# Altium PCB 8 Motors.PcbDoc (part 3 of 4)
Units mm, origin at the board's own origin, x right, y up, seen from the top; angles counter-clockwise.
Board outline 155 x 95 mm, 4 copper layers (Top Layer, GND, POWER, Bottom Layer), stack 0.778 mm thick; 196 components, 175 nets, 825 pads, 449 vias.
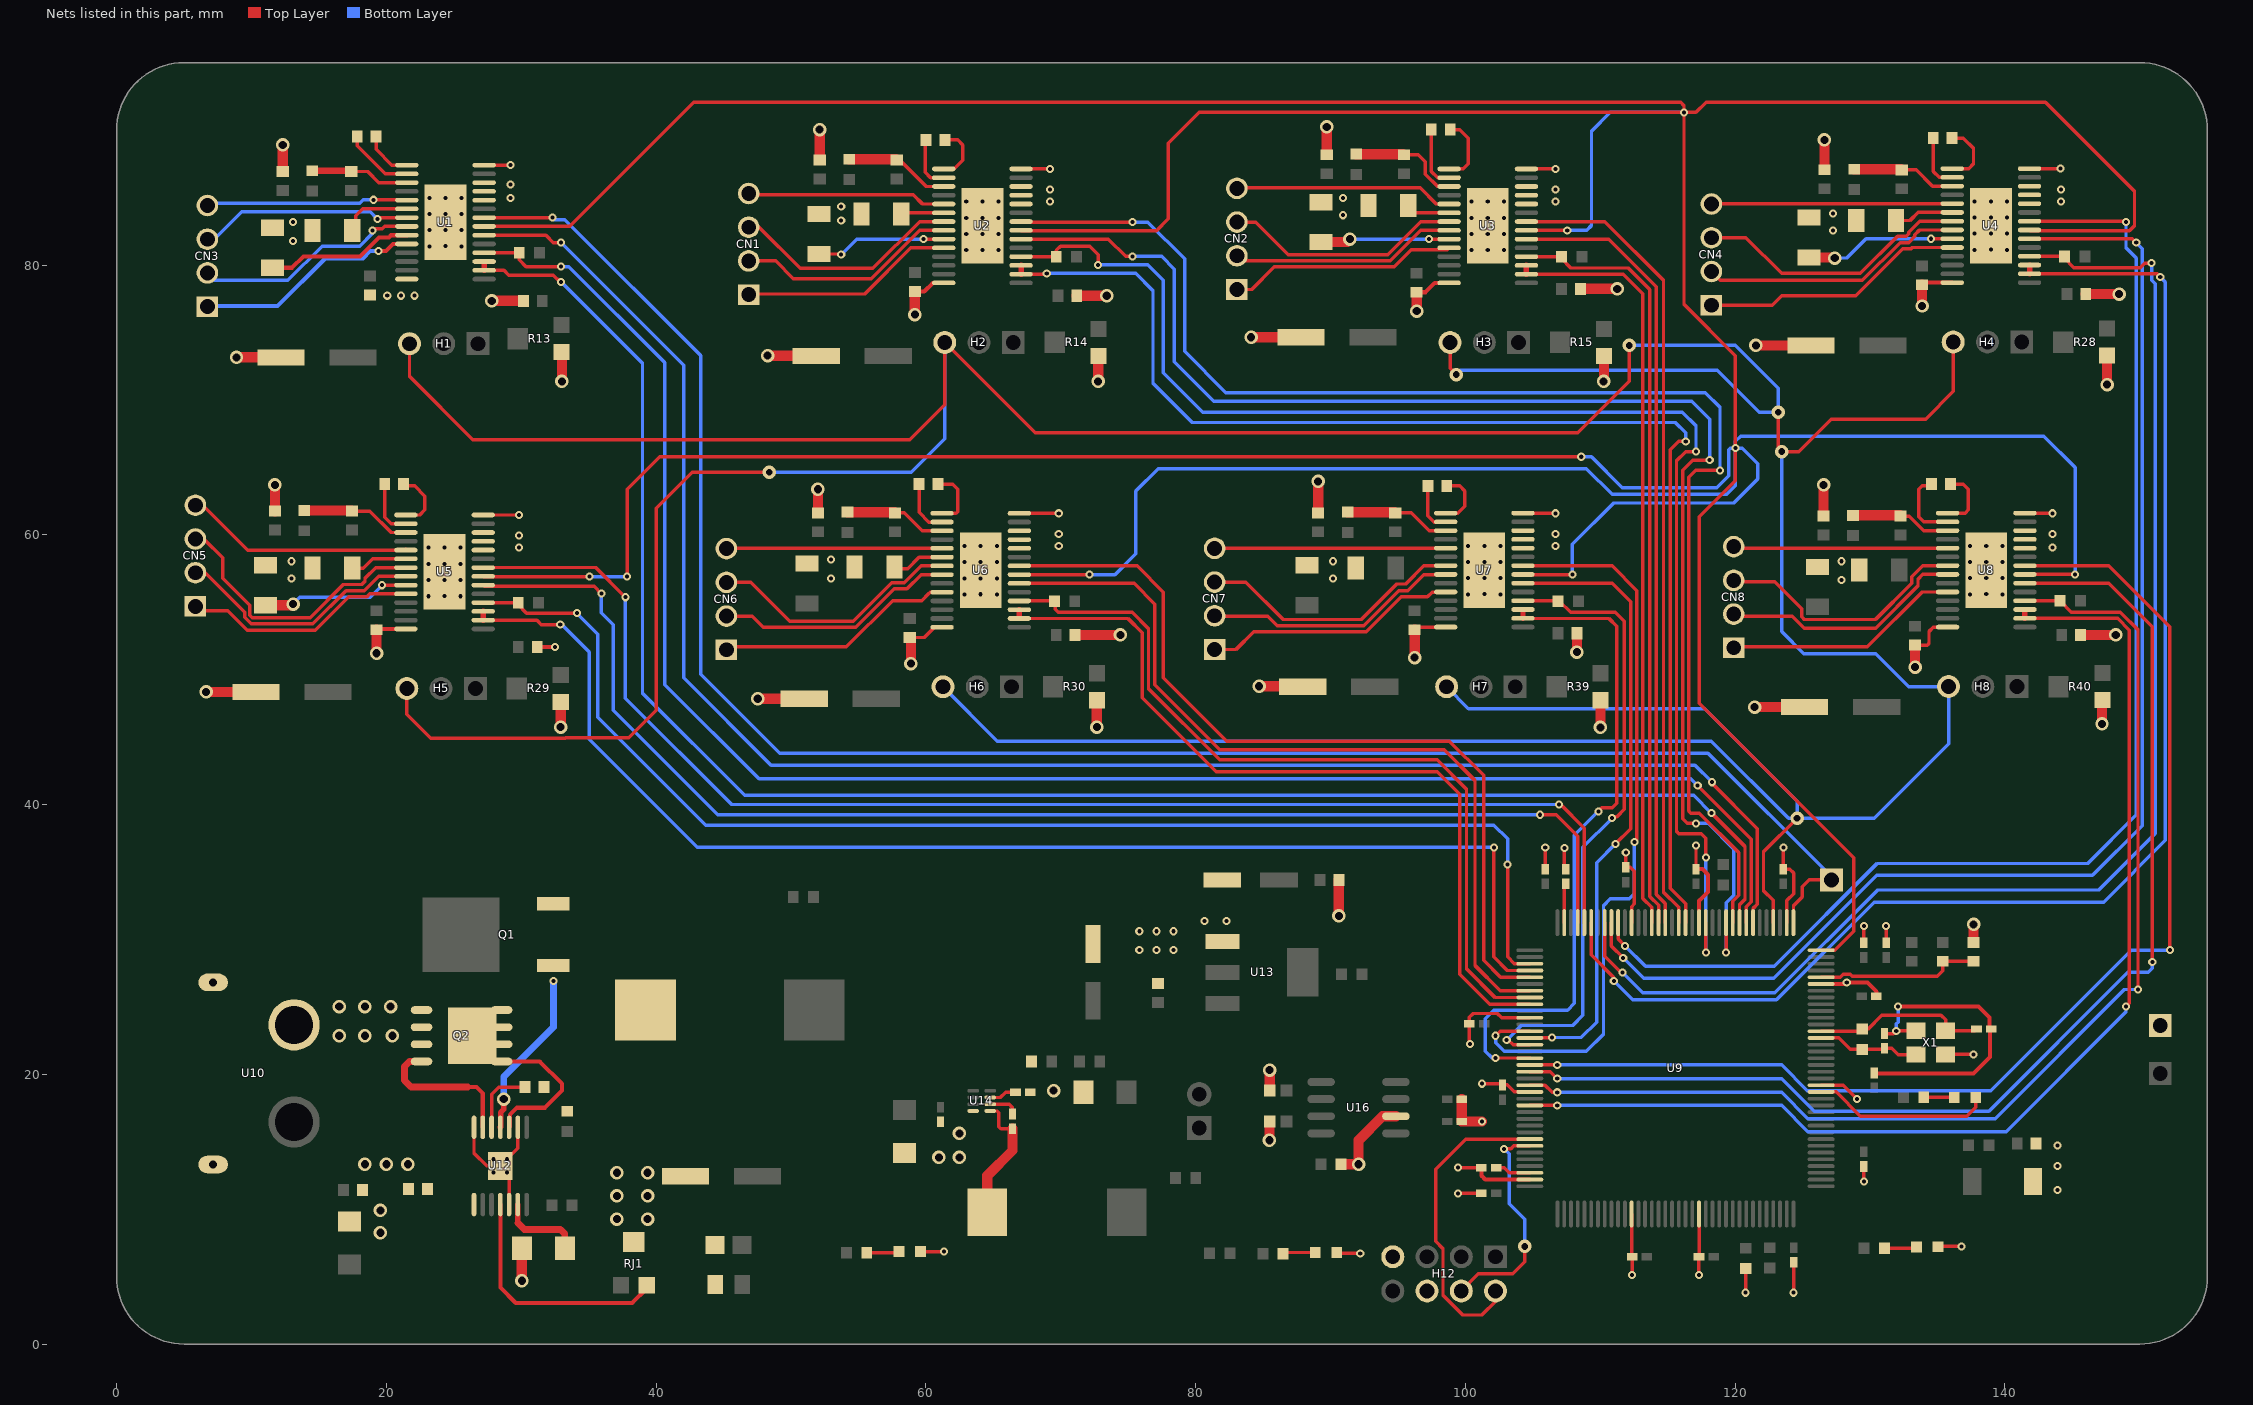
[diagram p4: the nets of this part, all layers, seen from the top]

## Via types
v1: diameter 0.6, hole 0.3, Top Layer to Bottom Layer, tented both sides, 222 vias
v2: diameter 0.5, hole 0.3, Top Layer to Bottom Layer, tented both sides, 96 vias
v3: diameter 1, hole 0.6, Top Layer to Bottom Layer, tented both sides, 88 vias
v4: diameter 1, hole 0.6, Top Layer to Bottom Layer, 17 vias
v5: diameter 1, hole 0.5, Top Layer to Bottom Layer, tented both sides, 16 vias
v6: diameter 4, hole 3.2, Top Layer to Bottom Layer, tented both sides, 4 vias
v7: diameter 0.61, hole 0.305, Top Layer to Bottom Layer, tented both sides, 4 vias
v8: diameter 0.6, hole 0.3, Top Layer to Bottom Layer, 2 vias

## Nets (pads, with @x,y where several pads share a name; then routed paths per layer and width w, separated by ;. In a path a pad name is that pad's centre, name@x,y a point inside that pad or via, vN(x,y) a via of type N, cw(c..) or ccw(c..) an arc to the next point about the centre after c; other vN are vias at no path point) (continued)
GND: C7.1 C8.1 C9.1 C10.2 C11.2 C12.2 C13.1 C14.1 C15.1 C16.1 C17.1 C18.1 C25.1 C26.1 C27.1 C28.2 C29.2 C30.2 C31.1 C32.1 C33.1 C34.1 C35.1 C36.1 C41.1 C42.1 C43.2 C44.2 C45.1 C46.1 C47.1 C48.1 C49.2 C50.1 C51.1 C52.1 C53.1 C54.1 C55.2 C56.2 C57.2 C58.2 C59.2 C60.2 C61.2 C62.2 C63.2 C64.2 C65.2 C66.2 C67.1 C68.1 C69.1 C70.1 C71.1 C72.2 C73.1 C76.2 C78.1 C79.1 C80.2 C81.2 C82.2 C83.2 C84.1 C85.1 C86.2 C87.2 H9.1 H12.6 H12.7 LED2_+24V.1 LED3_+5V.1 LED4_+3.3V.1 Q2.1 Q2.2 Q2.3 R4.1 R5.1 R6.1 R7.1 R8.1 R9.1 R13.1 R14.1 R15.1 R19.1 R20.1 R21.1 R22.1 R23.1 R24.1 R28.1 R29.1 R30.1 R33.1 R34.1 R35.1 R36.1 R39.1 R40.1 R42.1 R51.1 R56.2 RJ1.2 SW1.2 U1.14 U1.24 U1.25 U1.26 U1.28 U1.29 U2.14 U2.24 U2.25 U2.26 U2.28 U2.29 U3.14 U3.24 U3.25 U3.26 U3.28 U3.29 U4.14 U4.24 U4.25 U4.26 U4.28 U4.29 U5.14 U5.24 U5.25 U5.26 U5.28 U5.29 U6.14 U6.24 U6.25 U6.26 U6.28 U6.29 U7.14 U7.24 U7.25 U7.26 U7.28 U7.29 U8.14 U8.24 U8.25 U8.26 U8.28 U8.29 U9.16 U9.31 U9.38 U9.51 U9.61 U9.83 U9.94 U9.107 U9.120 U9.130 U10.1 U10.2 U10.4 U12.5 U12.9 U12.14 U12.15 U13.1 U14.4 U16.2 U17.1 U18.1 X1.2 X1.4 | length 254.8
  Top Layer w0.254: C35.1@19.27,52.966 C35.1@19.322,53.018 ; U12.14@26.498,16.074 26.498,14.142 27.432,13.208 U12.15@28.448,13.208 ; U5.28@27.178,61.468 v1(29.845,61.468) ; U1.28@27.25,87.41 v1@29.176,87.41 ; U12.5@29.098,10.342 29.098,12.558 v7(28.948,12.708) U12.15@28.448,13.208 ; U12.9@29.748,16.074 29.748,14.508 U12.15@28.448,13.208 ; R13.1@32.994,73.549 R13.1@33.02,73.523 ; C11.2@51.834,73.279 cw(c51.834,73.245) C11.2@51.868,73.245 ; C36.1@58.801,52.386 58.894,52.386 59.879,52.386 60.638,53.145 U6.14@61.197,53.145 ; LED2_+24V.1@59.6,6.861 v1@61.338,6.861 ; U6.28@66.929,61.595 v1(69.85,61.595) ; U2.28@67.056,87.122 v1(69.215,87.122) ; R14.1@72.771,73.232 cw(c72.8,73.232) R14.1@72.8,73.261 ; LED3_+5V.1@90.461,6.798 ccw(c90.528,6.798) 90.528,6.731 v1(92.202,6.731) ; C47.1@96.232,52.966 96.411,53.145 U7.14@98.535,53.145 ; v1(99.441,11.176) C61.2@101.182,11.176 ; v1(99.441,13.081) C69.1@101.182,13.081 ; v1@100.33,22.352 100.293,22.389 C64.2@100.293,23.749 100.293,24.22 100.584,24.511 102.362,24.511 102.676,24.197 U9.83@104.77,24.197 ; v1(101.219,19.304) 102.653,19.304 C66.2@102.743,19.214 103.087,19.214 103.604,18.697 U9.94@104.77,18.697 ; U7.28@104.267,61.595 v1(106.68,61.595) ; U3.28@104.521,87.122 v1(106.68,87.122) ; C57.2@105.918,35.216 v1(105.918,36.83) ; v1(107.34,36.788) 107.34,35.318 C68.1@107.442,35.216 ; v1(111.887,36.449) C56.2@111.887,35.343 112.231,35.343 112.522,35.052 112.522,32.637 112.32,32.435 U9.61@112.32,31.247 ; U9.120@112.32,9.647 112.32,6.515 C62.2@112.358,6.477 v1(112.358,5.117) ; C55.2@117.094,35.216 v1(117.094,36.957) ; v1(117.311,5.117) C63.2@117.311,6.477 117.32,6.486 U9.130@117.32,9.647 ; v1(120.777,3.81) R42.1@120.777,5.597 ; v1(123.571,36.83) C58.2@123.571,35.216 124.042,35.216 124.333,34.925 124.333,33.401 123.82,32.888 U9.38@123.82,31.247 ; v1(124.333,3.81) C65.2@124.333,6.059 ; U9.16@126.37,19.197 127.996,19.197 v1(129.032,18.161) ; v1(129.54,12.065) C49.2@129.54,13.171 ; C51.1@129.54,29.501 C51.1@129.54,29.755 v1(129.54,30.988) ; C59.2@130.302,20.103 C59.2@130.339,20.066 ; C53.1@131.064,23.024 131.736,23.024 v1(131.939,23.227) X1.4@133.393,23.227 ; C50.1@131.191,29.501 C50.1@131.191,29.755 v1(131.191,30.988) ; C48.1@133.331,51.823 134.246,51.823 134.366,51.943 134.366,52.832 134.694,53.16 U8.14@135.746,53.16 ; C34.1@133.849,78.531 C34.1@134.015,78.697 ; LED4_+3.3V.1@135.038,7.21 cw(c135.067,7.21) 135.067,7.239 v1(136.779,7.239) ; X1.2@135.593,21.477 v8@137.682,21.477 ; U8.28@141.478,61.61 141.478,61.595 v1(143.51,61.595) ; U4.28@141.821,87.147 v1(144.12,87.147) ; R40.1@147.193,47.72 R40.1@147.222,47.749
  Top Layer w0.305: C35.1@19.322,53.018 U5.14@21.446,53.018 ; C32.1@31.18,51.689 v1(32.512,51.689) ; C17.1@59.182,78.04 59.879,78.04 60.511,78.672 U2.14@61.324,78.672 ; C18.1@96.359,77.985 97.035,77.985 97.722,78.672 U3.14@98.789,78.672 ; C69.1@101.182,13.081 101.182,12.483 101.468,12.197 U9.107@104.77,12.197 ; C55.2@117.094,35.216 117.565,35.216 117.983,34.798 117.983,33.528 117.32,32.865 U9.51@117.32,31.247 ; U9.31@126.37,26.697 128.17,26.697 v1(128.27,26.797) 129.794,26.797 130.466,26.125 C60.2@130.466,25.781 ; C59.2@130.339,20.066 137.668,20.066 138.901,21.299 138.901,23.368 138.848,23.421 138.848,24.22 138.049,25.019 v8(132.08,25.019) ; C34.1@134.015,78.697 U4.14@136.089,78.697
  Top Layer w0.762: v3(6.638,48.353) C30.2@10.339,48.353 ; v3(8.89,73.152) C10.2@12.189,73.152 ; C26.1@11.739,61.753 v3(11.739,63.699) ; C7.1@12.319,86.933 v3(12.319,88.9) ; v3(19.27,51.215) C35.1@19.27,52.966 ; v3(27.813,77.343) C14.1@30.161,77.343 ; v3(30.044,4.699) C73.1@30.044,7.112 ; v3(32.922,45.749) R29.1@32.922,47.607 ; v3(33.02,71.374) R13.1@33.02,73.523 ; v3(47.532,47.845) C29.2@50.979,47.845 ; v3(48.26,73.279) C11.2@51.834,73.279 ; C27.1@51.998,61.626 v3(51.998,63.373) ; C8.1@52.125,87.788 v3(52.125,90.043) ; v3(58.894,50.453) C36.1@58.894,52.386 ; v3(59.182,76.327) C17.1@59.182,78.04 ; C33.1@71.058,52.578 v3(74.422,52.578) ; C15.1@71.185,77.724 v3(73.406,77.724) ; v3(72.673,45.749) R30.1@72.673,47.734 ; v3(72.771,71.374) R14.1@72.771,73.232 ; v3(84.108,74.642) C12.2@87.809,74.642 ; v3(84.709,48.768) 87.902,48.768 C43.2@87.936,48.734 ; v3(85.471,15.113) 85.471,16.497 U18.1@85.484,16.51 ; U17.1@85.484,18.796 v3(85.484,20.307) ; C41.1@89.082,61.626 v3(89.082,63.953) ; C9.1@89.717,88.169 v3(89.717,90.242) ; v3(90.616,31.75) C83.2@90.616,34.417 ; R56.2@90.788,13.335 v3(92.075,13.335) 92.075,15.113 93.853,16.891 U16.2@94.847,16.891 ; v3(96.232,50.893) C47.1@96.232,52.966 ; C18.1@96.359,77.985 96.393,77.951 v3(96.393,76.581) ; C86.2@99.732,18.161 C87.2@99.732,16.51 v1(101.219,16.51) ; v3(108.269,51.308) C45.1@108.269,52.705 ; C16.1@108.523,78.232 v3(111.252,78.232) ; v3(110.011,45.72) R39.1@110.011,47.734 ; v3(110.236,71.374) 110.265,71.403 R15.1@110.265,73.261 ; v3(121.431,47.225) C44.2@125.147,47.225 ; v3(121.539,74.041) 125.608,74.041 C28.2@125.617,74.032 ; C42.1@126.547,61.387 v3(126.547,63.699) ; C25.1@126.619,87.06 v3(126.619,89.281) ; v3@133.331,50.057 v3(133.331,50.184) C48.1@133.331,51.823 ; v3(133.849,76.962) C34.1@133.849,78.531 ; C52.1@137.668,29.783 v3(137.668,31.115) ; C46.1@145.607,52.578 v3(148.209,52.578) ; C31.1@145.988,77.851 v3(148.463,77.851) ; v3(147.193,45.974) R40.1@147.193,47.72 ; v3(147.565,71.129) R28.1@147.565,73.286
  Bottom Layer w0.254: v1(131.939,23.227) 131.939,23.735 132.08,23.876 v8(132.08,25.019)
  other v1: 61.341,6.861 143.891,11.43 143.891,13.208 143.891,14.732 100.33,22.262 75.819,29.21 77.089,29.21 78.359,29.21 75.819,30.607 77.089,30.607 78.359,30.607 80.645,31.369 82.296,31.369 127.889,56.642 12.954,56.769 52.959,56.769 90.17,56.769 12.954,58.039 90.17,58.039 127.889,58.039 52.959,58.166 29.845,59.055 143.51,59.055 69.85,59.182 106.68,59.182 29.845,59.944 69.85,60.071 106.68,60.071 143.51,60.071 20.066,77.724 21.082,77.724 22.098,77.724 13.081,81.788 127.254,82.55 13.081,83.185 53.721,83.312 90.932,83.693 127.254,83.82 53.721,84.328 69.215,84.709 106.68,84.709 144.145,84.709 29.206,84.963 90.932,84.963 69.215,85.598 106.68,85.598 144.145,85.598 29.206,85.979 29.206,87.41
  other v2: 23.112,55.443 25.512,55.443 24.312,55.465 62.863,55.57 65.263,55.57 100.201,55.585 102.601,55.585 137.412,55.585 139.812,55.585 64.063,55.592 101.401,55.607 138.612,55.607 23.112,56.643 24.312,56.643 25.512,56.643 62.863,56.77 64.063,56.77 65.263,56.77 100.201,56.785 101.401,56.785 102.601,56.785 137.412,56.785 138.612,56.785 139.812,56.785 23.112,57.843 24.312,57.843 25.512,57.843 62.863,57.97 64.063,57.97 65.263,57.97 100.201,57.985 101.401,57.985 102.601,57.985 137.412,57.985 138.612,57.985 139.812,57.985 23.112,59.043 24.312,59.043 25.512,59.043 62.863,59.17 64.063,59.17 65.263,59.17 100.201,59.185 101.401,59.185 102.601,59.185 137.412,59.185 138.612,59.185 139.812,59.185 62.99,81.097 65.39,81.097 100.455,81.097 102.855,81.097 64.19,81.119 101.655,81.119 137.755,81.122 140.155,81.122 138.955,81.144 23.184,81.385 25.584,81.385 24.384,81.407 62.99,82.297 64.19,82.297 65.39,82.297 100.455,82.297 101.655,82.297 102.855,82.297 137.755,82.322 138.955,82.322 140.155,82.322 23.184,82.585 24.384,82.585 25.584,82.585 62.99,83.497 64.19,83.497 65.39,83.497 100.455,83.497 101.655,83.497 102.855,83.497 137.755,83.522 138.955,83.522 140.155,83.522 23.184,83.785 24.384,83.785 25.584,83.785 62.99,84.697 64.19,84.697 65.39,84.697 100.455,84.697 101.655,84.697 102.855,84.697 137.755,84.722 138.955,84.722 140.155,84.722 23.184,84.985 24.384,84.985 25.584,84.985
  other v3: 19.558,8.255 37.084,9.271 39.37,9.271 19.558,9.906 37.084,10.986 39.37,10.986 37.084,12.7 39.37,12.7 18.415,13.335 20.002,13.335 21.59,13.335 60.96,13.843 62.484,13.843 62.484,15.621
  other v4: 69.469,18.796 16.51,22.86 18.415,22.86 20.447,22.86 16.51,25.019 18.415,25.019 20.32,25.019
  other v7: 27.948,12.708 27.948,13.708 28.948,13.708
  other v8: 137.668,21.463
LED1: LED1.1 U9.15 | length 13.2
  Top Layer w0.254: U9.15@126.37,18.697 127.48,18.697 129.286,16.891 137.16,16.891 137.832,17.563 LED1.1@137.832,18.291
M1A1: CN3.4 U1.5 | length 15
  Top Layer w0.254: v1(19.05,84.836) U1.5@21.518,84.836
  Bottom Layer w0.254: CN3.4@6.731,84.415 6.898,84.582 18.034,84.582 18.288,84.836 v1(19.05,84.836)
M1A2: CN3.3 U1.7 | length 16.1
  Top Layer w0.254: v1@19.304,83.566 v1@19.342,83.528 ; v1(19.342,83.401) v1@19.342,83.528 ; U1.7@21.518,83.51 19.502,83.51 19.431,83.439 v1@19.342,83.528
  Bottom Layer w0.254: CN3.3@6.731,81.915 7.239,81.915 9.271,83.947 18.796,83.947 v1(19.342,83.401)
M1B1: CN3.1 U1.10 | length 16.8
  Top Layer w0.305: v1(19.431,81.026) 19.96,81.026 20.494,81.56 U1.10@21.518,81.56
  Bottom Layer w0.305: CN3.1@6.731,76.962 11.938,76.962 15.469,80.493 18.263,80.493 18.796,81.026 v1(19.431,81.026) v1@19.431,81.153
M1B2: CN3.2 U1.8 | length 16.9
  Top Layer w0.254: v1(18.971,82.564) 19.089,82.682 19.692,82.682 19.87,82.86 U1.8@21.518,82.86
  Bottom Layer w0.254: CN3.2@6.731,79.415 7.279,78.867 12.7,78.867 15.24,81.407 18.034,81.407 18.971,82.344 v1(18.971,82.564) v1@19.036,82.564
M1D: U1.20 U9.43 | length 133.3
  Top Layer w0.254: U1.20@27.25,82.21 31.836,82.21 32.385,81.661 v1(32.956,81.661) ; v1@118.244,41.611 121.641,38.215 121.641,32.614 121.32,32.293 U9.43@121.32,31.247
  Bottom Layer w0.254: v1(32.956,81.661) 42.037,72.581 42.037,49.403 48.514,42.926 117.019,42.926 v1(118.289,41.656)
M1FA: R10.1 U1.18 U9.44 | length 132.6
  Top Layer w0.254: U1.18@27.25,80.91 29.843,80.91 R10.1@29.854,80.899 29.854,80.382 30.353,79.883 v1(32.956,79.883) v1@33.02,79.883 ; v1(117.221,41.402) 121.183,37.44 121.183,32.803 120.82,32.44 U9.44@120.82,31.247
  Bottom Layer w0.254: v1(32.956,79.883) 33.528,79.883 40.64,72.771 40.64,48.895 47.625,41.91 116.713,41.91 v1(117.221,41.402)
M1SL: U1.16 U1.17 U9.45 | length 131.9
  Top Layer w0.254: U1.16@27.25,79.61 28.721,79.61 29.083,79.248 32.385,79.248 v1@32.893,78.74 ; v1(118.237,39.37) 118.243,39.376 120.726,36.892 120.726,32.992 120.32,32.586 U9.45@120.32,31.247
  Top Layer w0.406: U1.16@27.25,79.61 U1.17@27.25,80.26
  Bottom Layer w0.254: v1(32.956,78.74) 38.989,72.707 38.989,48.26 46.563,40.686 116.921,40.686 v1(118.237,39.37)
M1ST: H10.1 U1.22 U9.37 | length 139.5
  Top Layer w0.254: U1.22@27.25,83.51 v1(32.314,83.51) ; U9.37@124.32,31.247 124.32,32.499 124.968,33.147 124.968,33.909 125.476,34.417 H10.1@127.127,34.417
  Bottom Layer w0.254: v1(32.314,83.51) 32.466,83.358 33.239,83.358 43.307,73.29 43.307,49.657 49.149,43.815 117.983,43.815 127.127,34.671 H10.1@127.127,34.417
M2A1: CN1.4 U2.5 | length 14.8
  Top Layer w0.254: CN1.4@46.863,85.304 46.95,85.217 59.055,85.217 59.75,84.522 U2.5@61.324,84.522
M2A2: CN1.3 U2.7 | length 17.2
  Top Layer w0.254: CN1.3@46.863,82.804 47.625,82.804 50.673,79.756 56.067,79.756 59.533,83.222 U2.7@61.324,83.222
M2B1: CN1.1 U2.10 | length 15.9
  Top Layer w0.254: CN1.1@46.863,77.804 46.91,77.851 55.455,77.851 58.876,81.272 U2.10@61.324,81.272
M2B2: CN1.2 U2.8 | length 16.5
  Top Layer w0.254: CN1.2@46.863,80.304 48.855,80.304 50.165,78.994 55.952,78.994 59.53,82.572 U2.8@61.324,82.572
M2D: U2.20 U9.47 | length 106.7
  Top Layer w0.254: U2.20@67.056,81.922 73.526,81.922 74.803,80.645 v1(75.311,80.645) ; v1(117.094,38.608) 116.459,38.608 116.103,38.964 116.103,64.795 116.84,65.532 v1(118.11,65.532) ; v1(119.32,29.023) U9.47@119.32,31.247
  Bottom Layer w0.254: v1(75.311,80.645) 77.47,80.645 78.422,79.692 78.422,72.834 81.343,69.913 116.776,69.913 118.11,68.58 v1(118.11,65.532) ; v1(117.094,38.608) 117.985,38.608 119.888,36.705 119.888,33.274 119.32,32.706 v1(119.32,29.023)
M2FA: R11.1 U2.18 U9.50 | length 104.8
  Top Layer w0.254: U2.18@67.056,80.622 69.649,80.622 69.649,81.079 69.977,81.407 72.136,81.407 72.771,80.772 v1(72.771,80.01) ; v1(117.094,66.167) 116.332,66.167 115.646,65.481 115.646,38.024 115.824,37.846 117.475,37.846 117.82,37.501 v1(117.82,36.068) ; v1(117.82,29.023) U9.50@117.82,31.247
  Bottom Layer w0.254: v1(72.771,80.01) 76.454,80.01 77.597,78.867 77.597,72.009 80.518,69.088 116.078,69.088 117.094,68.072 v1(117.094,66.167) ; v1(117.82,29.023) v1(117.82,36.068)
M2SL: U2.16 U2.17 U9.53 | length 96.4
  Top Layer w0.254: U2.16@67.056,79.322 68.908,79.322 v1(68.961,79.375) ; U9.53@116.32,31.247 116.32,32.651 115.189,33.782 115.189,66.294 115.824,66.929 v1(116.332,66.929)
  Top Layer w0.406: U2.16@67.056,79.322 U2.17@67.056,79.972
  Bottom Layer w0.254: v1(68.961,79.375) 75.565,79.375 76.835,78.105 76.835,71.247 79.756,68.326 115.57,68.326 116.332,67.564 v1(116.332,66.929)
M2ST: U2.22 U9.46 | length 103.9
  Top Layer w0.254: U2.22@67.056,83.222 67.093,83.185 v1(75.311,83.185) ; v1(118.872,64.77) 117.069,64.77 116.561,64.262 116.561,39.522 116.713,39.37 117.346,39.37 120.269,36.447 120.269,33.274 119.82,32.825 U9.46@119.82,31.247
  Bottom Layer w0.254: v1(75.311,83.185) 76.454,83.185 79.184,80.454 79.184,73.596 82.237,70.544 117.788,70.544 118.872,69.46 v1(118.872,64.77)
M3A1: CN2.4 U3.5 | length 16.2
  Top Layer w0.254: CN2.4@83.058,85.685 83.098,85.725 96.647,85.725 97.85,84.522 U3.5@98.789,84.522
M3A2: CN2.3 U3.7 | length 17.7
  Top Layer w0.254: CN2.3@83.058,83.185 84.455,83.185 86.868,80.772 94.234,80.772 96.684,83.222 U3.7@98.789,83.222
M3B1: CN2.1 U3.10 | length 17
  Top Layer w0.254: CN2.1@83.058,78.185 84.154,78.185 85.827,79.858 94.717,79.858 95.983,81.124 98.641,81.124 U3.10@98.789,81.272
M3B2: CN2.2 U3.8 | length 16.8
  Top Layer w0.254: CN2.2@83.058,80.685 83.428,80.315 94.423,80.315 96.68,82.572 U3.8@98.789,82.572
M3D: U3.20 U9.56 | length 58.5
  Top Layer w0.254: U3.20@104.521,81.922 110.627,81.922 114.157,78.392 114.157,33.33 114.82,32.667 U9.56@114.82,31.247
M3FA: R12.1 U3.18 U9.57 | length 57.5
  Top Layer w0.254: U3.18@104.521,80.622 R12.1@107.114,80.622 ; R12.1@107.125,80.611 107.125,80.454 107.8,79.779 112.063,79.779 113.657,78.185 113.657,33.183 114.32,32.521 U9.57@114.32,31.247
  Top Layer w0.305: R12.1@107.114,80.622 R12.1@107.125,80.611
M3SL: U3.16 U3.17 U9.58 | length 56.8
  Top Layer w0.254: U3.16@104.521,79.322 111.707,79.322 113.157,77.872 113.157,33.037 113.82,32.374 U9.58@113.82,31.247
  Top Layer w0.406: U3.16@104.521,79.322 U3.17@104.521,79.972
M3ST: U3.22 U9.54 | length 60.1
  Top Layer w0.254: U3.22@104.521,83.222 110.326,83.222 114.681,78.867 114.681,33.513 115.82,32.374 U9.54@115.82,31.247
M4A1: CN4.4 U4.5 | length 17.9
  Top Layer w0.254: CN4.4@118.237,84.522 118.262,84.547 U4.5@136.089,84.547
M4A2: CN4.3 U4.7 | length 20.6
  Top Layer w0.254: CN4.3@118.237,82.022 120.797,82.022 123.444,79.375 129.286,79.375 132.033,82.122 132.665,82.122 132.859,82.316 132.859,82.44 133.666,83.247 U4.7@136.089,83.247
M4B1: CN4.1 U4.10 | length 19.6
  Top Layer w0.254: CN4.1@118.237,77.022 122.742,77.022 123.444,77.724 128.928,77.724 132.412,81.208 133.044,81.208 133.133,81.297 U4.10@136.089,81.297
M4B2: CN4.2 U4.8 | length 19.7
  Top Layer w0.254: CN4.2@118.237,79.522 118.892,78.867 129.425,78.867 132.223,81.665 132.855,81.665 133.316,82.126 133.316,82.25 133.662,82.597 U4.8@136.089,82.597
M4D: U4.20 U9.64 | length 98.2
  Top Layer w0.254: U9.64@110.82,31.247 110.82,29.515 v1(111.697,28.639) ; U4.20@141.821,81.947 149.447,81.947 v1(149.733,81.661)
  Bottom Layer w0.254: v1(111.697,28.639) 113.221,27.114 122.872,27.114 130.502,34.744 146.491,34.744 150.19,38.443 150.19,81.204 v1(149.733,81.661)
M4FA: R25.1 U4.18 U9.65 | length 101.3
  Top Layer w0.254: U9.65@110.32,31.247 110.32,28.745 111.506,27.559 v1(111.633,27.559) ; U4.18@141.821,80.647 144.414,80.647 R25.1@144.425,80.636 144.425,80.492 145.113,79.804 150.035,79.804 150.368,80.137 v1(150.876,80.137)
  Bottom Layer w0.254: v1(111.633,27.559) 113.157,26.035 122.923,26.035 130.552,33.664 146.938,33.664 151.13,37.856 151.13,78.611 150.881,78.86 150.881,79.116 150.876,79.121 v1(150.876,80.137)
M4SL: U4.16 U4.17 U9.67 | length 103.8
  Top Layer w0.254: U9.67@109.32,31.247 109.32,28.856 110.998,27.178 v1(110.998,26.924) ; U4.16@141.821,79.347 151.285,79.347 v1(151.511,79.121)
  Top Layer w0.406: U4.16@141.821,79.347 U4.17@141.821,79.997
  Bottom Layer w0.254: v1(110.998,26.924) 112.395,25.527 123.062,25.527 130.301,32.766 147.31,32.766 151.892,37.348 151.892,78.74 v1(151.511,79.121)
M4ST: U4.22 U9.63 | length 96.6
  Top Layer w0.254: U9.63@111.32,31.247 111.32,30.031 v1(111.823,29.527) ; U4.22@141.821,83.247 148.909,83.247 v1(148.971,83.185)
  Bottom Layer w0.254: v1(111.823,29.527) 113.347,28.003 122.88,28.003 130.509,35.633 146.123,35.633 149.733,39.243 149.733,80.518 148.971,81.28 v1(148.971,83.185)
M5A1: CN5.4 U5.5 | length 17
  Top Layer w0.254: CN5.4@5.842,62.19 6.39,62.19 9.712,58.868 U5.5@21.446,58.868 U5.5@21.446,58.932
M5A2: CN5.3 U5.7 | length 21
  Top Layer w0.254: CN5.3@5.842,59.69 6.477,59.69 7.874,58.293 7.874,56.769 9.868,54.775 9.868,54.042 10.062,53.848 14.351,53.848 16.819,56.316 18.187,56.316 18.415,56.544 18.415,56.769 19.214,57.568 U5.7@21.446,57.568
M5B1: CN5.1 U5.10 | length 17.4
  Top Layer w0.254: CN5.1@5.842,54.69 6.168,54.364 8.253,54.364 9.683,52.934 14.73,52.934 17.198,55.402 18.566,55.402 18.782,55.618 U5.10@21.446,55.618
M5B2: CN5.2 U5.8 | length 18.9
  Top Layer w0.254: CN5.2@5.842,57.19 6.564,57.19 9.487,54.267 9.487,53.884 9.98,53.391 14.54,53.391 17.009,55.859 18.377,55.859 19.435,56.918 U5.8@21.446,56.918
M5D: U5.20 U9.69 | length 99.8
  Top Layer w0.254: U5.20@27.178,56.268 27.275,56.17 35.403,56.17 v1(35.941,55.633) ; v1(105.537,39.243) 106.737,39.243 108.32,37.66 U9.69@108.32,31.247
  Bottom Layer w0.254: v1(35.941,55.633) 35.941,54.229 36.83,53.34 36.83,46.99 44.577,39.243 v1(105.537,39.243)
M5FA: R26.1 U5.18 U9.75 | length 97.5
  Top Layer w0.254: U5.18@27.178,54.968 29.771,54.968 R26.1@29.782,54.957 29.782,54.8 30.387,54.195 v1(34.129,54.195) ; v1(103.124,35.56) 103.124,28.702 103.629,28.197 U9.75@104.77,28.197
  Bottom Layer w0.254: v1(34.129,54.195) 35.687,52.637 35.687,46.482 43.688,38.481 102.108,38.481 103.124,37.465 v1(103.124,35.56)
M5SL: U5.16 U5.17 U9.76 | length 97.6
  Top Layer w0.254: U5.16@27.178,53.668 31.168,53.668 31.496,53.34 v1(32.893,53.34) ; v1(102.108,36.83) 102.108,28.702 103.113,27.697 U9.76@104.77,27.697
  Top Layer w0.406: U5.16@27.178,53.668 U5.17@27.178,54.318
  Bottom Layer w0.254: v1(32.893,53.34) 33.02,53.34 35.052,51.308 35.052,44.831 43.053,36.83 v1(102.108,36.83)
M5ST: U5.22 U9.68 | length 101
  Top Layer w0.254: U5.22@27.178,57.568 27.187,57.577 35.514,57.577 v1(37.719,55.372) ; v1(106.934,40.005) 107.061,40.005 108.82,38.246 U9.68@108.82,31.247
  Bottom Layer w0.254: v1(37.719,55.372) 37.719,47.879 45.593,40.005 v1(106.934,40.005)
M6A1: CN6.4 U6.5 | length 16
  Top Layer w0.254: CN6.4@45.212,58.975 45.232,58.995 U6.5@61.197,58.995
M6A2: CN6.3 U6.7 | length 18.9
  Top Layer w0.254: CN6.3@45.212,56.475 47.03,56.475 49.911,53.594 54.61,53.594 57.459,56.443 58.409,56.443 59.66,57.695 U6.7@61.197,57.695
M6B1: CN6.1 U6.10 | length 17.8
  Top Layer w0.254: CN6.1@45.212,51.475 45.426,51.689 54.102,51.689 57.531,55.118 59.692,55.118 60.193,55.619 60.193,55.621 60.317,55.745 U6.10@61.197,55.745
M6B2: CN6.2 U6.8 | length 18
  Top Layer w0.254: CN6.2@45.212,53.975 47.117,53.975 47.955,53.137 54.799,53.137 57.649,55.986 58.598,55.986 59.657,57.045 U6.8@61.197,57.045
M6D: U6.20 U9.79 | length 61.9
  Top Layer w0.254: U6.20@66.929,56.395 75.431,56.395 76.962,54.864 76.962,48.895 81.788,44.069 98.425,44.069 100.711,41.783 100.711,28.067 102.581,26.197 U9.79@104.77,26.197
M6FA: R27.1 U6.18 U9.80 | length 60.7
  Top Layer w0.254: U6.18@66.929,55.095 69.522,55.095 R27.1@69.533,55.084 69.596,55.021 69.596,54.483 69.827,54.252 75.288,54.252 76.505,53.035 76.505,48.592 81.79,43.307 97.917,43.307 100.076,41.148 100.076,27.813 102.192,25.697 U9.80@104.77,25.697
M6SL: U6.16 U6.17 U9.81 | length 61
  Top Layer w0.254: U6.16@66.929,53.795 74.983,53.795 76.048,52.73 76.048,47.904 81.534,42.418 97.917,42.418 99.568,40.767 99.568,27.432 101.803,25.197 U9.81@104.77,25.197
  Top Layer w0.406: U6.16@66.929,53.795 U6.17@66.929,54.445
M6ST: U6.22 U9.77 | length 62.2
  Top Layer w0.254: U6.22@66.929,57.695 75.655,57.695 77.597,55.753 77.597,49.403 82.296,44.704 98.806,44.704 101.346,42.164 101.346,28.448 102.597,27.197 U9.77@104.77,27.197
M7A1: CN7.4 U7.5 | length 17.1
  Top Layer w0.254: CN7.4@81.407,58.995 81.422,59.01 U7.5@98.535,59.01
M7A2: CN7.3 U7.7 | length 19.9
  Top Layer w0.254: CN7.3@81.407,56.495 83.713,56.495 86.487,53.721 92.274,53.721 94.903,56.35 95.564,56.35 96.909,57.695 U7.7@98.535,57.695
M7B1: CN7.1 U7.10 | length 18.9
  Top Layer w0.254: CN7.1@81.407,51.495 82.991,51.495 84.303,52.807 92.652,52.807 95.248,55.402 97.185,55.402 97.528,55.745 U7.10@98.535,55.745
M7B2: CN7.2 U7.8 | length 19
  Top Layer w0.254: CN7.2@81.407,53.995 81.427,53.975 85.344,53.975 86.055,53.264 92.463,53.264 95.058,55.859 95.72,55.859 96.905,57.045 U7.8@98.535,57.045
M7D: U7.20 U9.86 | length 46.2
  Top Layer w0.254: U7.20@104.267,56.395 110.871,56.395 112.243,55.023 112.243,38.202 v1(111.125,37.084) ; U9.86@104.77,22.697 106.39,22.697 v1(106.426,22.733)
  Bottom Layer w0.254: v1(106.426,22.733) 108.585,22.733 109.728,23.876 109.728,35.687 v1(111.125,37.084)
M7FA: R37.1 U7.18 U9.87 | length 47
  Top Layer w0.254: v1(103.06,22.543) 103.188,22.543 103.533,22.197 U9.87@104.77,22.197 ; U7.18@104.267,55.095 106.86,55.095 R37.1@106.871,55.084 106.968,55.084 107.8,54.252 111.117,54.252 111.775,53.594 111.775,39.639 111.237,39.101 110.983,39.101 v1(110.871,38.989)
  Bottom Layer w0.254: v1(103.06,22.543) 104.14,23.622 107.95,23.622 108.712,24.384 108.712,36.83 v1(110.871,38.989)
M7SL: U7.16 U7.17 U9.89 | length 50.6
  Top Layer w0.254: v1(102.235,21.209) 104.758,21.209 U9.89@104.77,21.197 ; U7.16@104.267,53.795 110.645,53.795 111.227,53.213 111.227,40.082 110.896,39.751 110.109,39.751 v1(109.855,39.497)
  Top Layer w0.406: U7.16@104.267,53.795 U7.16@104.267,53.81 U7.17@104.267,54.445
  Bottom Layer w0.254: v1(102.235,21.209) 101.981,21.209 101.473,21.717 101.473,24.13 102.108,24.765 107.569,24.765 108.077,25.273 108.077,37.719 v1(109.855,39.497)
M7ST: U7.22 U9.85 | length 55.9
  Top Layer w0.254: v1(102.235,22.86) 102.572,23.197 U9.85@104.77,23.197 ; U7.22@104.267,57.695 110.871,57.695 112.7,55.866 112.7,37.389 v1(112.522,37.211)
  Bottom Layer w0.254: v1(102.235,22.86) 102.235,22.352 102.87,21.717 108.966,21.717 110.236,22.987 110.236,32.512 110.744,33.02 112.141,33.02 112.522,33.401 v1(112.522,37.211)
M8A1: CN8.4 U8.5 | length 15.9
  Top Layer w0.254: CN8.4@119.888,59.122 120,59.01 U8.5@135.746,59.01
M8A2: CN8.3 U8.7 | length 19.3
  Top Layer w0.254: CN8.3@119.888,56.622 119.995,56.515 122.936,56.515 124.93,54.521 124.93,53.915 125.124,53.721 130.4,53.721 133.096,56.417 133.096,56.896 133.91,57.71 U8.7@135.746,57.71
M8B1: CN8.1 U8.10 | length 17.6
  Top Layer w0.254: CN8.1@119.888,51.622 119.955,51.689 129.794,51.689 133.863,55.758 134.5,55.758 134.502,55.76 U8.10@135.746,55.76
M8B2: CN8.2 U8.8 | length 18.2
  Top Layer w0.254: CN8.2@119.888,54.122 120.035,53.975 124.223,53.975 125.112,53.086 130.429,53.086 133.553,56.21 133.553,56.707 133.906,57.06 U8.8@135.746,57.06
M8D: U8.20 U9.91 | length 87.9
  Top Layer w0.254: U9.91@104.77,20.197 106.295,20.197 v1(106.807,19.685) ; U8.20@141.478,56.41 147.701,56.41 150.921,53.19 v1(150.921,28.321)
  Bottom Layer w0.254: v1(106.807,19.685) 123.444,19.685 125.852,17.277 138.816,17.277 149.098,27.559 150.622,27.559 150.921,27.858 v1(150.921,28.321)
M8FA: R38.1 U8.18 U9.93 | length 86
  Top Layer w0.254: U9.93@104.77,19.197 105.898,19.197 106.426,18.669 v1(106.807,18.669) ; U8.18@141.478,55.11 144.071,55.11 R38.1@144.082,55.099 144.914,54.267 148.54,54.267 148.587,54.221 148.59,54.221 149.86,52.951 v1(149.86,26.289)
  Bottom Layer w0.254: v1(106.807,18.669) 123.444,18.669 125.393,16.72 139.275,16.72 148.844,26.289 v1(149.86,26.289)
M8SL: U8.16 U8.17 U9.96 | length 85.8
  Top Layer w0.254: U9.96@104.77,17.697 v1@106.763,17.697 ; U8.16@141.478,53.81 148.351,53.81 149.225,52.936 149.225,25.273 v1(148.971,25.019)
  Top Layer w0.406: U8.16@141.478,53.81 U8.17@141.478,54.46
  Bottom Layer w0.254: v1(106.807,17.697) 123.444,17.697 125.393,15.748 140.081,15.748 148.971,24.638 v1(148.971,25.019)
M8ST: U8.22 U9.90 | length 89.2
  Top Layer w0.254: U9.90@104.77,20.697 v1(106.807,20.697) ; U8.22@141.478,57.71 147.701,57.71 152.221,53.19 v1(152.221,29.21)
  Bottom Layer w0.254: v1(106.807,20.697) 123.444,20.697 125.35,18.791 138.933,18.791 149.352,29.21 v1(152.221,29.21)
MCU_RX: H12.4 U9.102 | length 16.6
  Top Layer w0.254: H12.4@99.695,3.937 100.965,5.207 103.505,5.207 104.394,6.096 v5(104.394,7.239) ; v1(102.87,14.478) 103.378,14.478 103.597,14.697 U9.102@104.77,14.697
  Bottom Layer w0.254: v1(102.87,14.478) 103.251,14.097 103.251,10.414 104.394,9.271 v5(104.394,7.239)
MCU_TX: H12.2 U9.101 | length 23.2
  Top Layer w0.254: H12.2@102.235,3.937 102.235,3.175 101.219,2.159 99.804,2.159 98.335,3.628 98.335,7.075 97.79,7.62 97.79,12.954 100.033,15.197 U9.101@104.77,15.197
MCU_Vref: H1.3 H2.3 H3.3 H4.3 H5.3 H6.3 H7.3 H8.3 U9.40 | length 390.7
  Top Layer w0.254: H5.3@21.518,48.607 21.518,46.681 23.28,44.919 33.266,44.919 33.305,44.958 37.973,44.958 40.005,46.99 40.005,61.976 42.672,64.643 v5(48.387,64.643) ; H1.3@21.717,74.168 21.717,71.755 26.416,67.056 58.801,67.056 61.396,69.651 H2.3@61.396,74.261 68.093,67.564 108.331,67.564 112.141,71.374 v5(112.141,74.041) ; H3.3@98.861,74.261 98.861,72.335 v5(99.314,71.882) ; U9.40@122.82,31.247 122.809,32.893 122.098,33.604 122.098,36.5 v5(124.587,38.989) ; v5(123.19,69.088) 123.19,66.421 v5(123.444,66.167) 124.714,66.167 127.127,68.58 134.112,68.58 136.161,70.629 H4.3@136.161,74.286
  Bottom Layer w0.254: v5(48.387,64.643) 58.928,64.643 61.396,67.111 H2.3@61.396,74.261 ; H6.3@61.269,48.734 65.299,44.704 118.237,44.704 123.952,38.989 v5(124.587,38.989) ; H7.3@98.607,48.734 100.224,47.117 117.729,47.117 124.587,40.259 v5(124.587,38.989) ; v5(99.314,71.882) 99.636,72.204 118.677,72.204 121.793,69.088 v5(123.19,69.088) 123.19,70.866 120.015,74.041 v5(112.141,74.041) ; v5(123.444,66.167) 123.444,52.832 125.095,51.181 130.429,51.181 132.861,48.749 H8.3@135.818,48.749 135.818,44.505 130.302,38.989 v5(124.587,38.989)
NEN: U1.21 U2.21 U3.21 U4.21 U5.21 U6.21 U7.21 U8.21 U9.36 | length 516.8
  Top Layer w0.254: U5.21@27.178,56.918 27.2,56.896 v1(35.052,56.896) ; U1.21@27.25,82.86 33.584,82.86 42.799,92.075 115.951,92.075 116.205,91.821 v1(116.205,91.313) ; v1(37.846,56.896) 37.846,63.373 40.259,65.786 v1(108.585,65.786) ; U6.21@66.929,57.045 v1(72.114,57.045) ; U2.21@67.056,82.572 67.073,82.555 77.094,82.555 77.978,83.439 77.978,89.027 80.264,91.313 v1(116.205,91.313) ; U7.21@104.267,57.045 v1(107.928,57.045) ; U3.21@104.521,82.572 v1(107.547,82.572) ; U9.36@126.37,29.197 127.368,29.197 128.778,30.607 128.778,36.068 117.348,47.498 117.348,61.341 120.015,64.008 v1(120.015,66.421) 120.015,73.279 116.205,77.089 v1(116.205,91.313) ; U8.21@141.478,57.06 v1(145.198,57.06) ; U4.21@141.821,82.597 141.863,82.555 149.232,82.555 149.601,82.924 149.601,85.476 143.002,92.075 117.856,92.075 117.094,91.313 v1(116.205,91.313)
  Bottom Layer w0.254: v1(35.052,56.896) v1(37.846,56.896) ; v1(72.114,57.045) 74.019,57.045 75.565,58.591 75.565,63.246 77.216,64.897 108.966,64.897 110.871,62.992 119.38,62.992 120.015,63.627 v1(120.015,66.421) ; v1(107.547,82.572) 108.988,82.572 109.347,82.931 109.347,89.916 110.744,91.313 v1(116.205,91.313) ; v1(107.928,57.045) 107.928,59.287 110.998,62.357 119.888,62.357 121.666,64.135 121.666,65.278 120.523,66.421 v1(120.015,66.421) ; v1(108.585,65.786) 109.347,65.786 111.633,63.5 118.618,63.5 119.507,64.389 119.507,66.294 119.634,66.421 v1(120.015,66.421) ; v1(145.198,57.06) 145.198,64.987 142.875,67.31 120.396,67.31 120.015,66.929 v1(120.015,66.421)
NetC1_1: C1.1 U1.2 | length 5.2
  Top Layer w0.254: C1.1@17.842,89.535 17.842,88.838 19.92,86.76 U1.2@21.518,86.76
NetC1_2: C1.2 U1.1 | length 3.7
  Top Layer w0.254: C1.2@19.242,89.535 19.242,88.581 20.413,87.41 U1.1@21.518,87.41
NetC2_1: C2.1 U2.2 | length 4
  Top Layer w0.254: C2.1@60.006,89.281 59.944,89.219 59.944,86.868 60.34,86.472 U2.2@61.324,86.472
NetC2_2: C2.2 U2.1 | length 4.3
  Top Layer w0.254: U2.1@61.324,87.122 62.103,87.122 62.738,87.757 62.738,88.9 62.357,89.281 C2.2@61.406,89.281
NetC3_1: C3.1 U3.2 | length 4.6
  Top Layer w0.254: C3.1@97.471,90.043 97.471,86.933 97.932,86.472 U3.2@98.789,86.472
NetC3_2: C3.2 U3.1 | length 5.1
  Top Layer w0.254: U3.1@98.789,87.122 99.822,87.122 100.203,87.503 100.203,89.408 99.568,90.043 C3.2@98.871,90.043
NetC4_1: C4.1 R3.2 U1.3 | length 7.4
  Top Layer w0.254: C4.1@17.399,86.933 18.607,86.933 19.43,86.11 U1.3@21.518,86.11
  Top Layer w0.508: R3.2@14.505,86.986 17.346,86.986 C4.1@17.399,86.933
NetC5_1: C5.1 R1.2 U2.3 | length 7.8
  Top Layer w0.254: C5.1@57.787,87.841 C5.1@57.84,87.788 58.056,87.788 60.021,85.822 U2.3@61.324,85.822
  Top Layer w0.762: R1.2@54.311,87.841 C5.1@57.787,87.841
NetC6_1: C6.1 R2.2 U3.3 | length 8.4
  Top Layer w0.254: C6.1@95.379,88.222 C6.1@95.432,88.169 96.489,88.169 97.014,87.644 97.014,86.744 97.935,85.822 U3.3@98.789,85.822
  Top Layer w0.762: R2.2@91.903,88.222 C6.1@95.379,88.222
NetC19_1: C19.1 U4.2 | length 4.1
  Top Layer w0.254: C19.1@134.682,89.408 134.682,86.933 135.118,86.497 U4.2@136.089,86.497
NetC19_2: C19.2 U4.1 | length 4.8
  Top Layer w0.254: C19.2@136.082,89.408 136.906,89.408 137.668,88.646 137.668,87.503 137.312,87.147 U4.1@136.089,87.147
NetC20_1: C20.1 U5.2 | length 4.2
  Top Layer w0.254: C20.1@19.874,63.754 19.874,61.291 20.347,60.818 U5.2@21.446,60.818
NetC20_2: C20.2 U5.1 | length 4.5
  Top Layer w0.254: C20.2@21.274,63.754 21.401,63.627 22.098,63.627 22.86,62.865 22.86,61.849 22.479,61.468 U5.1@21.446,61.468
NetC21_1: C21.1 U6.2 | length 4.1
  Top Layer w0.254: C21.1@59.498,63.754 59.498,61.657 60.21,60.945 U6.2@61.197,60.945
NetC21_2: C21.2 U6.1 | length 4.5
  Top Layer w0.254: C21.2@60.898,63.754 61.976,63.754 62.357,63.373 62.357,61.722 62.23,61.595 U6.1@61.197,61.595
NetC22_1: C22.1 R16.2 U4.3 | length 7.8
  Top Layer w0.254: C22.1@132.351,87.051 133.421,87.051 134.625,85.847 U4.3@136.089,85.847
  Top Layer w0.762: R16.2@128.822,87.104 132.298,87.104 C22.1@132.351,87.051
NetC23_1: C23.1 R17.2 U5.3 | length 8.2
  Top Layer w0.254: C23.1@17.401,61.806 C23.1@17.454,61.753 18.765,61.753 20.35,60.168 U5.3@21.446,60.168
  Top Layer w0.762: R17.2@13.925,61.806 C23.1@17.401,61.806
NetC24_1: C24.1 R18.2 U6.3 | length 7.6
  Top Layer w0.254: C24.1@57.713,61.626 58.389,61.626 59.72,60.295 U6.3@61.197,60.295
  Top Layer w0.762: R18.2@54.184,61.679 57.66,61.679 C24.1@57.713,61.626
NetC37_1: C37.1 U7.2 | length 3.7
  Top Layer w0.254: C37.1@97.217,63.627 97.217,61.406 97.678,60.945 U7.2@98.535,60.945
NetC37_2: C37.2 U7.1 | length 4.3
  Top Layer w0.254: U7.1@98.535,61.595 99.441,61.595 99.949,62.103 99.949,63.246 99.568,63.627 C37.2@98.617,63.627
NetC38_1: C38.1 U8.2 | length 5.4
  Top Layer w0.254: C38.1@134.555,63.754 134.428,63.627 133.858,63.627 133.604,63.373 133.604,61.341 133.985,60.96 U8.2@135.746,60.96
NetC38_2: C38.2 U8.1 | length 4.7
  Top Layer w0.254: U8.1@135.746,61.61 137.048,61.61 137.287,61.849 137.287,63.373 136.906,63.754 C38.2@135.955,63.754
NetC39_1: C39.1 R31.2 U7.3 | length 7.8
  Top Layer w0.254: C39.1@94.797,61.626 95.981,61.626 97.312,60.295 U7.3@98.535,60.295
  Top Layer w0.762: R31.2@91.268,61.679 94.744,61.679 C39.1@94.797,61.626
NetC40_1: C40.1 R32.2 U8.3 | length 7.5
  Top Layer w0.254: C40.1@132.262,61.387 132.911,61.387 133.988,60.31 U8.3@135.746,60.31
  Top Layer w0.762: R32.2@128.733,61.44 132.209,61.44 C40.1@132.262,61.387
NetC52_2: C52.2 L2.1 U9.32 | length 12.3
  Top Layer w0.254: U9.32@126.37,27.197 127.779,27.197 128.009,27.427 128.531,27.427 128.679,27.28 134.976,27.28 135.382,27.686 L2.1@135.382,28.383 C52.2@137.668,28.383
NetC53_2: C53.2 R43.1 U9.23 X1.1 | length 7.6
  Top Layer w0.254: U9.23@126.37,22.697 127.671,22.697 128.515,21.853 R43.1@129.413,21.853 C53.2@131.064,21.853 ; C53.2@131.064,21.934 131.609,21.934 132.08,21.463 133.379,21.463 X1.1@133.393,21.477
NetC54_2: C54.2 R43.2 U9.24 X1.3 | length 13
  Top Layer w0.254: U9.24@126.37,23.197 129.251,23.197 R43.2@129.413,23.359 129.852,23.359 130.877,24.384 135.255,24.384 135.593,24.046 X1.3@135.593,23.227 137.744,23.227 C54.2@137.885,23.368
NetC68_2: C68.2 U9.71 | length 2.9
  Top Layer w0.254: U9.71@107.32,31.247 107.32,34.004 C68.2@107.442,34.126
NetC69_2: C69.2 U9.106 | length 2.7
  Top Layer w0.254: C69.2@102.272,13.081 102.87,13.081 103.254,12.697 U9.106@104.77,12.697
NetC72_1: C72.1 U12.1
NetC73_2: C73.2 U12.6 | length 6.2
  Top Layer w0.406: 29.748,8.987 U12.6@29.748,10.342
  Top Layer w0.508: 29.748,8.987 30.226,8.509 32.893,8.509 33.23,8.172 C73.2@33.23,7.112
NetC74_1: C74.1 U12.12 | length 5.2
  Top Layer w0.254: U12.12@27.798,16.074 27.798,18.527 28.321,19.05 C74.1@30.288,19.05
NetC74_2: C74.2 L3.1 Q1.3 Q2.5 Q2.6 Q2.7 Q2.8 Q2.9 R47.2 U12.10 | length 11.2
  Top Layer w0.305: Q2.5@28.546,20.955 31.369,20.955 33.02,19.304 33.02,18.796 31.75,17.526 29.689,17.526 29.17,17.007 29.17,16.146 U12.10@29.098,16.074
NetC75_1: C75.1 R48.1 RJ1.3 U12.4 | length 18.2
  Top Layer w0.305: U12.4@28.448,10.342 28.448,4.191 29.591,3.048 38.227,3.048 39.304,4.125 RJ1.3@39.304,4.369
NetC77_1: C77.1 U14.6 | length 2.2
  Top Layer w0.254: U14.6@64.767,17.784 65.655,17.784 65.659,17.78 66.167,17.78 66.421,17.526 C77.1@66.421,17.055
NetC77_2: C77.2 L4.1 U14.5 | length 9.8
  Top Layer w0.254: U14.5@64.767,17.284 65.266,17.284 65.405,17.145 65.405,16.129 65.569,15.965 C77.2@66.421,15.965
  Top Layer w0.762: L4.1@64.543,9.779 64.543,12.473 66.421,14.351 C77.2@66.421,15.965
NetC84_2: C84.2 U14.7 | length 2
  Top Layer w0.254: U14.7@64.767,18.284 65.528,18.284 65.913,18.669 C84.2@66.638,18.669
NetLED1_2: LED1.2 R46.1 | length 2.3
  Top Layer w0.254: R46.1@133.976,18.288 136.23,18.288 LED1.2@136.234,18.285
NetLED2_2: LED2_+24V.2 U15.1 | length 2.4
  Top Layer w0.254: U15.1@55.617,6.763 57.91,6.763 LED2_+24V.2@58.002,6.855
NetLED3_2: LED3_+5V.2 R49.1 | length 2.4
  Top Layer w0.254: R49.1@86.487,6.7 86.578,6.791 LED3_+5V.2@88.863,6.791
NetLED4_2: LED4_+3.3V.2 R52.1 | length 2.4
  Top Layer w0.254: R52.1@131.055,7.112 133.348,7.112 LED4_+3.3V.2@133.44,7.203
NetQ1_1: Q1.1 U12.11 | length 12.5
  Top Layer w0.406: U12.11@28.448,16.074 28.469,16.095 28.469,17.169 28.702,17.401 v3(28.702,18.161)
  Bottom Layer w0.508: v3(28.702,18.161) 28.702,19.812 32.385,23.495 v1(32.385,26.924)
NetQ2_4: Q2.4 U12.13 | length 11.2
  Top Layer w0.305: 26.035,19.05 26.67,19.05 27.148,18.572 U12.13@27.148,16.074
  Top Layer w0.508: Q2.4@22.606,20.955 21.717,20.955 21.336,20.574 21.336,19.558 21.844,19.05 26.035,19.05
NetR4_2: R4.2 U1.6 | length 5.1
  Top Layer w0.254: R4.2@17.735,82.55 17.735,83.648 18.247,84.16 U1.6@21.518,84.16
NetR5_2: R5.2 U2.6 | length 3.2
  Top Layer w0.254: R5.2@58.176,83.786 58.262,83.872 U2.6@61.324,83.872
NetR6_2: R6.2 U3.6 | length 3.1
  Top Layer w0.254: R6.2@95.768,84.167 96.063,83.872 U3.6@98.789,83.872
NetR7_2: R7.2 U1.9 | length 11
  Top Layer w0.305: R7.2@11.557,79.801 12.999,79.801 13.843,80.645 18.051,80.645 19.448,82.042 20.185,82.042 20.353,82.21 U1.9@21.518,82.21
NetR8_2: R8.2 U2.9 | length 9.7
  Top Layer w0.254: R8.2@52.07,80.817 53.676,80.817 v1(53.721,80.772) ; v1(59.824,81.922) U2.9@61.324,81.922
  Bottom Layer w0.254: v1(53.721,80.772) 54.871,81.922 v1(59.824,81.922)
NetR9_2: R9.2 U3.9 | length 9.6
  Top Layer w0.254: v1(97.289,81.922) U3.9@98.789,81.922
  Top Layer w0.762: R9.2@89.281,81.706 91.231,81.706 v3(91.44,81.915)
  Bottom Layer w0.254: v3@91.447,81.922 v1(97.289,81.922)
NetR19_2: R19.2 U4.6 | length 4.4
  Top Layer w0.254: R19.2@131.925,83.303 132.96,83.303 133.554,83.897 U4.6@136.089,83.897
NetR20_2: R20.2 U5.6 | length 4.3
  Top Layer w0.254: R20.2@17.481,57.531 18.288,57.531 18.975,58.218 U5.6@21.446,58.218
NetR21_2: R21.2 U6.6 | length 3.6
  Top Layer w0.254: R21.2@57.922,57.497 58.64,57.497 59.488,58.345 U6.6@61.197,58.345
NetR22_2: R22.2 U4.9 | length 11.2
  Top Layer w0.254: v3@127.336,80.563 v3(127.381,80.518) ; v1(134.525,81.947) U4.9@136.089,81.947
  Top Layer w0.762: R22.2@125.476,80.563 v3@127.336,80.563
  Bottom Layer w0.254: v3(127.381,80.518) 128.27,80.518 129.699,81.947 v1(134.525,81.947)
NetR23_2: R23.2 U5.9 | length 11
  Top Layer w0.254: v1(19.685,56.261) 21.44,56.261 U5.9@21.446,56.268
  Top Layer w0.762: R23.2@11.049,54.782 12.999,54.782 v3(13.081,54.864)
  Bottom Layer w0.254: v3(13.081,54.864) 13.589,55.372 18.796,55.372 v1(19.685,56.261)